# Altium PCB B1001_01.PcbDoc
Units mil, origin at the board's own origin, x right, y up, seen from the top; angles counter-clockwise.
Board outline 3159.61 x 1978.5 mil, 2 copper layers (Top Layer, Bottom Layer); 15 components, 23 nets, 107 pads, 22 vias.
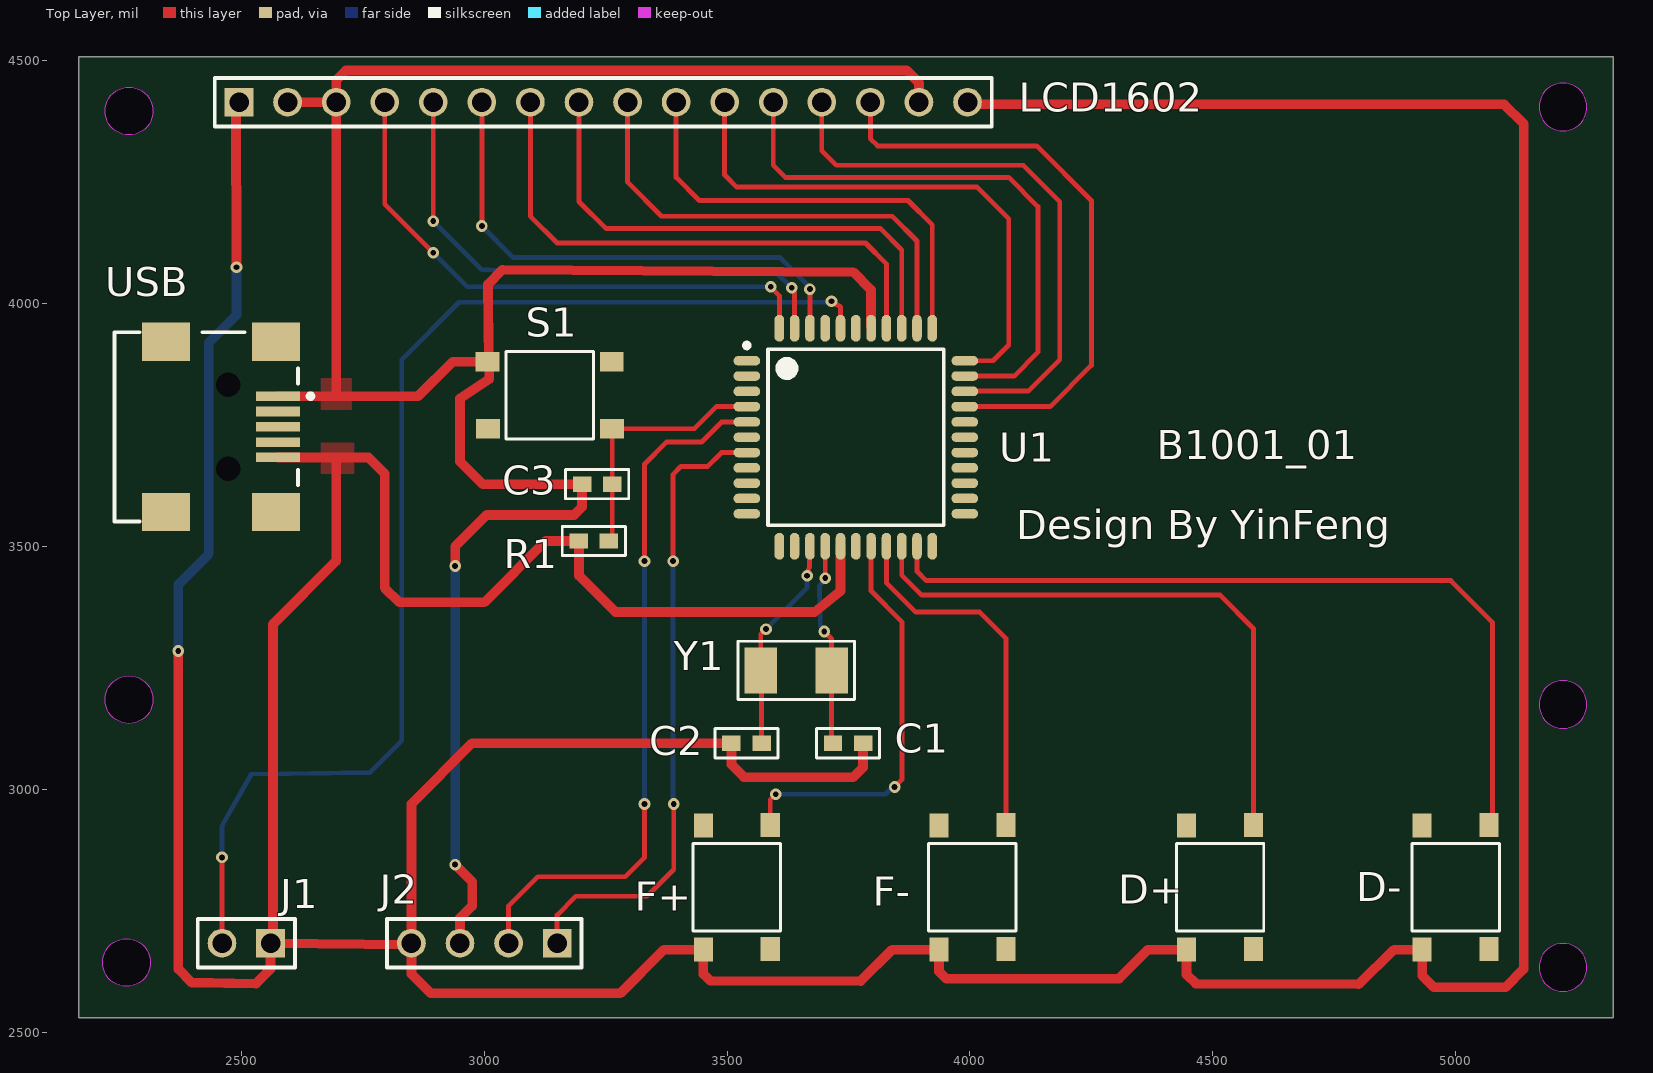
[diagram p0: Top Layer view]
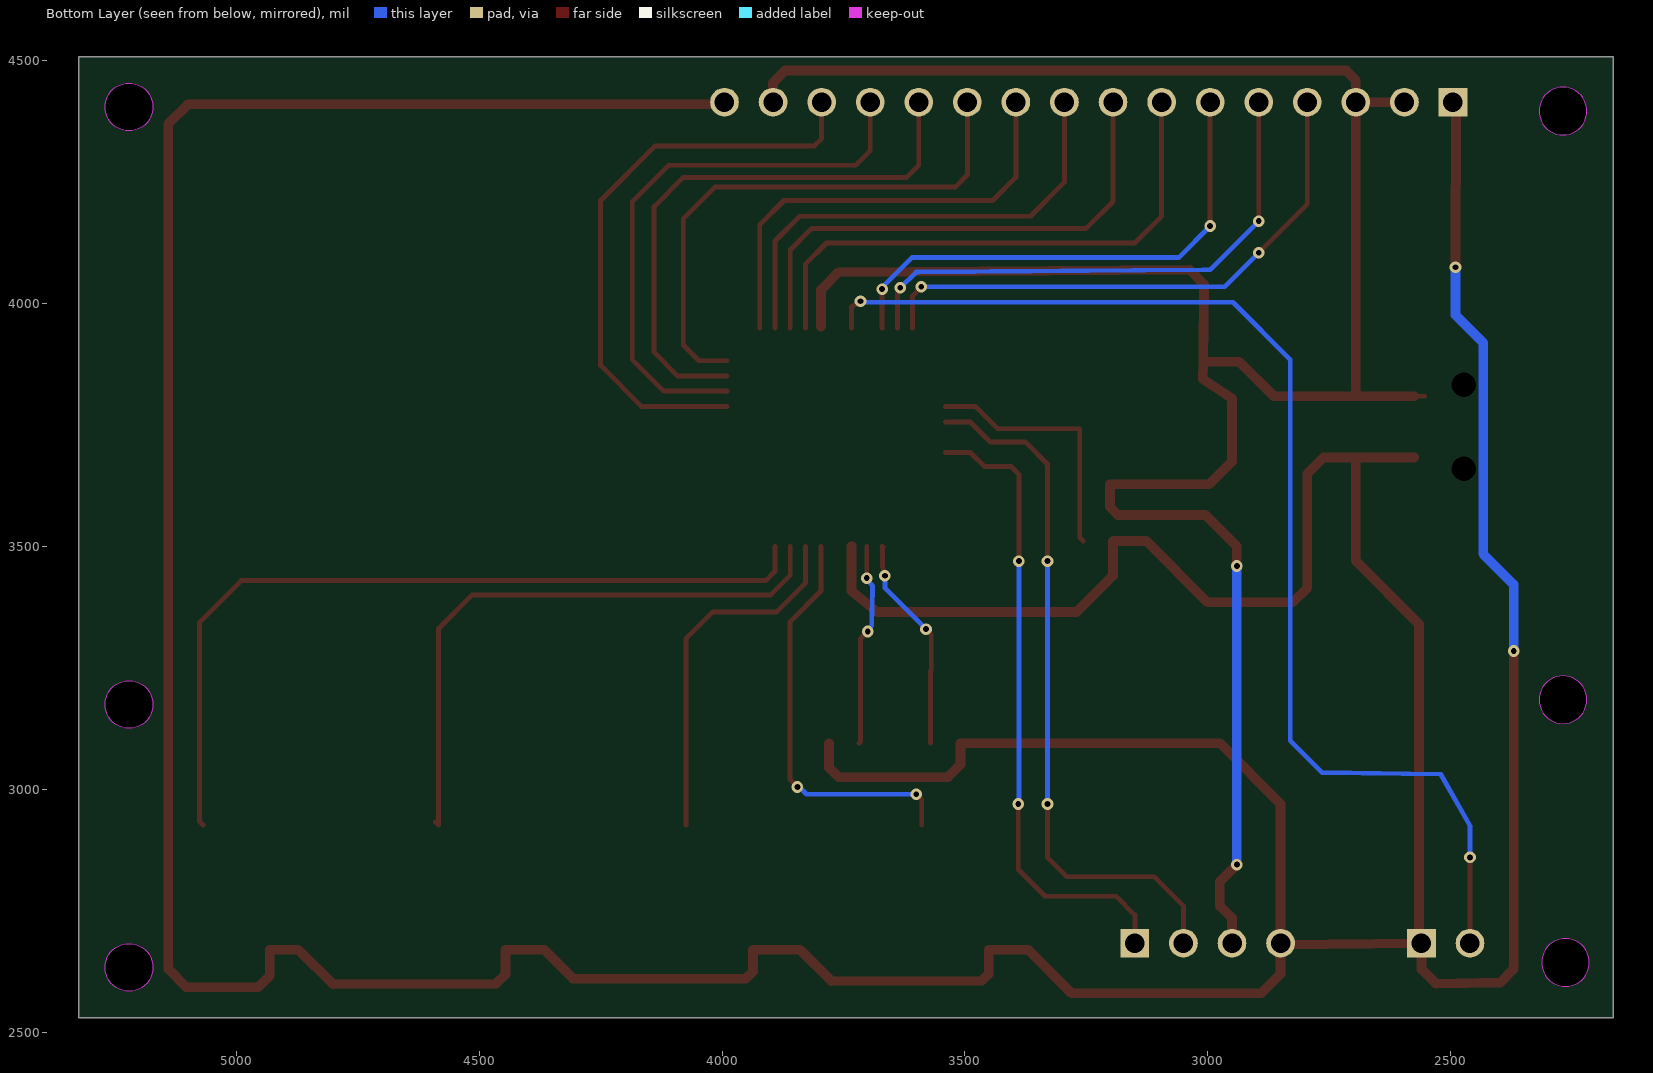
[diagram p1: Bottom Layer view, seen from below]

## Layer stack, top to bottom
Top Solder: solder mask 0.4, Solder Resist, Dk 3.5
Top Layer: signal copper 1.4
Dielectric 1: dielectric 12.6, FR-4, Dk 4.8
Bottom Layer: signal copper 1.4
Bottom Solder: solder mask 0.4, Solder Resist, Dk 3.5

## Board outline
2165,2530 5324.61,2530 5324.61,4508.5 2165,4508.5
cut-out: 5171.97,2633.43 ccw(c5221.18,2633.43) 5221.18,2584.21 ccw(c5221.18,2633.43) 5270.39,2633.43 ccw(c5221.18,2633.43) 5221.18,2682.64 ccw(c5221.18,2633.43)
cut-out: 5171.97,3174.76 ccw(c5221.18,3174.76) 5221.18,3125.55 ccw(c5221.18,3174.76) 5270.39,3174.76 ccw(c5221.18,3174.76) 5221.18,3223.98 ccw(c5221.18,3174.76)
cut-out: 2263.43,2594.21 cw(c2263.43,2643.43) 2214.21,2643.43 cw(c2263.43,2643.43) 2263.43,2692.64 cw(c2263.43,2643.43) 2312.64,2643.43 cw(c2263.43,2643.43)
cut-out: 2268.43,3135.39 cw(c2268.43,3184.61) 2219.21,3184.61 cw(c2268.43,3184.61) 2268.43,3233.82 cw(c2268.43,3184.61) 2317.64,3184.61 cw(c2268.43,3184.61)
cut-out: 5171.97,4405.08 ccw(c5221.18,4405.08) 5221.18,4355.87 ccw(c5221.18,4405.08) 5270.39,4405.08 ccw(c5221.18,4405.08) 5221.18,4454.29 ccw(c5221.18,4405.08)
cut-out: 2268.43,4347.36 cw(c2268.43,4396.57) 2219.21,4396.57 cw(c2268.43,4396.57) 2268.43,4445.79 cw(c2268.43,4396.57) 2317.64,4396.57 cw(c2268.43,4396.57)

## Design rules (kind name [scope] priority, off if disabled: settings)
Clearance [All] p1: gap=10 ignorepadtopadclearanceinfootprint=FALSE except(0: Arc-Hole Track-Hole SMDPad-Hole THPad-Hole Via-Hole Fill-Hole Poly-Hole Region-Hole Text-Hole)
PolygonConnect [All] p1: connectstyle=Relief reliefconductorwidth=10 reliefentries=4 polygonreliefangle="90 Angle" airgapwidth=10
RoutingVias [All] p1: holewidth=28 width=50 viastyle="Through Hole" minholewidth=28 minwidth=50 maxholewidth=28 maxwidth=50
SolderMaskExpansion [All] p1: expansion=4
Width [All] p1: maxlimit=10 minlimit=10 preferedwidth=10
30 further rules are at their usual default settings.

## Components (designator, comment, footprint, x,y, rotation, side; value= is the part's Value field where it differs from the comment)
C1 "Cap" 0603P 3749,3095 r180 top value=30pF
C2 "Cap" 0603P 3540,3095 r0 top value=30pF
C3 "Cap" 0603P 3232.4,3628.3 r180 top value=30pF
D+ "SW-PB" SMD4 4515,2798.43 r90 top
D- "SW-PB" SMD4 5000,2798.43 r90 top
F+ "SW-PB" SMD4 3520,2798.43 r90 top
F- "SW-PB" SMD4 4005,2798.43 r90 top
J1 "Header 2" HDR1X2 2560,2683.43 r180 top
J2 "CON4" HDR1X4 3150,2683.43 r180 top
LCD1602 "LCD1602" HDR1X16 2495,4415 r0 top
R1 "Res1" 0603P 3225.59,3511.49 r0 top value=10K
S1 "SW-PB" SMD4 3135,3811.49 r180 top
U1 "STC89C52" LQFP-44 3765,3725 r0 top
USB "USB" USB/SM0.8-6H5 2460,3746.5 r180 top
Y1 "11.0592M" SMD5032 3642.17,3245 r180 top

## Footprints (in the part's own frame and the unit in brackets; to place one, negate y for a bottom-side part, rotate by r counter-clockwise, add the part's x,y. Pads: shape width x height; smd on the part's side, far side on the other; paste and mask are expansions set on the pad)
0603P [mm]
  rect 0.965x0.8 smd: 1(-0.787,0) 2(0.788,0)
  silkscreen extent -1.65,-0.76 1.65,0.76
HDR1X2 [mm] "Connector; Header; 2 Position"
  rect 1.5x1.5 hole 1.02: 1(0,0)
  round 1.5 hole 1.02: 2(2.54,0)
  silkscreen extent -1.27,-1.27 3.81,1.27
HDR1X4 [mm] "Connector; Header; 4 Position"
  rect 1.5x1.5 hole 1.02: 1(0,0)
  round 1.5 hole 1.02: 2(2.54,0) 3(5.08,0) 4(7.62,0)
  silkscreen extent -1.27,-1.27 8.89,1.27
HDR1X16 [mm] "Connector; Header; 16 Position"
  rect 1.5x1.5 hole 1.02: 1(0,0)
  round 1.5 hole 1.02: 2(2.54,0) 3(5.08,0) 4(7.62,0) 5(10.16,0) 6(12.7,0) 7(15.24,0) 8(17.78,0) 9(20.32,0) 10(22.86,0) 11(25.4,0) 12(27.94,0) 13(30.48,0) 14(33.02,0) 15(35.56,0) 16(38.1,0)
  silkscreen extent -1.27,-1.27 39.37,1.27
LQFP-44 [mm] "LQFP-44"
  oval 1.4x0.5 smd: 1(-5.7,4) 2(-5.7,3.2) 3(-5.7,2.4) 4(-5.7,1.6) 5(-5.7,0.8) 6(-5.7,0) 7(-5.7,-0.8) 8(-5.7,-1.6) 9(-5.7,-2.4) 10(-5.7,-3.2) 11(-5.7,-4) 23(5.7,-4) 24(5.7,-3.2) 25(5.7,-2.4) 26(5.7,-1.6) 27(5.7,-0.8) 28(5.7,0) 29(5.7,0.8) 30(5.7,1.6) 31(5.7,2.4) 32(5.7,3.2) 33(5.7,4)
  oval 0.5x1.4 smd: 12(-4,-5.7) 13(-3.2,-5.7) 14(-2.4,-5.7) 15(-1.6,-5.7) 16(-0.8,-5.7) 17(0,-5.7) 18(0.8,-5.7) 19(1.6,-5.7) 20(2.4,-5.7) 21(3.2,-5.7) 22(4,-5.7) 34(4,5.7) 35(3.2,5.7) 36(2.4,5.7) 37(1.6,5.7) 38(0.8,5.7) 39(0,5.7) 40(-0.8,5.7) 41(-1.6,5.7) 42(-2.4,5.7) 43(-3.2,5.7) 44(-4,5.7)
  silkscreen extent -5.82,-4.6 4.6,4.92, body extent -6,-6 6,6, height 1.6
SMD4 [mm]
  rect 1.25x1 smd: 1(-3.261,1.75) 2(3.261,-1.75) 3(-3.238,-1.75) 4(3.238,1.75)
  silkscreen extent -2.29,-2.29 2.29,2.29
SMD5032 [mm]
  rect 1.7x2.4 smd: 1(-1.85,0) 2(1.85,0)
  silkscreen extent -3.05,-1.52 3.05,1.52
USB/SM0.8-6H5 [mm]
  rect 2.3x0.5 smd: 1(-2.927,-1.6) 2(-2.927,-0.8) 3(-2.927,0) 4(-2.927,0.8) 5(-2.927,1.6)
  rect 2.5x2 smd: 6(-2.827,4.45) 7(2.927,4.45) 8(-2.827,-4.45) 9(2.927,-4.45)
  round 0.6 hole 1.27 unplated: MH1(-0.327,2.2) MH2(-0.327,-2.2)
  silkscreen extent -4.75,-4.95 5.62,4.95

## Part data
C1 C2 C3: "Capacitor", LatestRevisionDate=17-Jul-2002, LatestRevisionNote="Re-released for DXP Platform.", PackageDescription="Radial Cap, Thru-Hole; 2 Leads; 0.3 in Pin Spacing", PackageReference=RAD-0.3, Published=8-Jun-2000, Publisher="Altium Limited"
D+ D- F+ F- S1: "Switch", LatestRevisionDate=17-Jul-2002, LatestRevisionNote="Re-released for DXP Platform.", PackageDescription="Switch; 2 Leads", PackageReference=SPST-2, Published=24-Mar-1999, Publisher="Altium Limited"
J1: "Header, 2-Pin", LatestRevisionDate=17-Jul-2002, LatestRevisionNote="Re-released for DXP Platform.", Publisher="Altium Limited"
R1: "Resistor", LatestRevisionDate=17-Jul-2002, LatestRevisionNote="Re-released for DXP Platform.", PackageDescription="Axial Device, Thru-Hole; 2 Leads; 0.3 in Pin Spacing", PackageReference=AXIAL-0.3, Published=8-Jun-2000, Publisher="Altium Limited"
Y1: library part XTAL, "Crystal Oscillator", LatestRevisionDate=17-Jul-2002, LatestRevisionNote="Re-released for DXP Platform.", PackageDescription="Crystal, Thru-Hole; 2 Leads; Body 3.1 x 8.2 mm (Dia.xH)", PackageReference=R38, Published=8-Jun-2000, Publisher="Altium Limited"

## Via types
v1: diameter 24, hole 12, Top Layer to Bottom Layer, tented both sides, 22 vias

## Nets (pads, with @x,y where several pads share a name; then routed paths per layer and width w, separated by ;. In a path a pad name is that pad's centre, name@x,y a point inside that pad or via, vN(x,y) a via of type N, cw(c..) or ccw(c..) an arc to the next point about the centre after c; other vN are vias at no path point)
+5: C3.2 J2.3 LCD1602.2 LCD1602.3 LCD1602.15 S1.2 U1.38 USB.1 | length 5249
  Top Layer w10: USB.1@2553.23,3809.49 USB.1@2575.23,3809.9 ; 2695,3814.49 2700,3809.49 ; 2861.08,3809.49 2862.56,3808 2864.05,3809.49 ; v1(2940,2845) v1@2943.79,2845 ; 3760,4065 3761.5,4065 ; U1.38 3794.64,3951.26 U1.38@3796.5,3953.12 ; LCD1602.15@3890.47,4419.53 LCD1602.15
  Top Layer w20: USB.1 2700,3809.49 2861.08,3809.49 ; LCD1602.2 LCD1602.3 ; 2695,3814.49 LCD1602.3 ; 2864.05,3809.49 2934.95,3880.39 S1.2 ; v1(2940,2845) 2975,2810 2975,2760 2950,2735 J2.3 ; v1(2940,3460) 2940,3500 3005,3565 3185,3565 3201.4,3581.4 C3.2 2996.7,3628.3 2950,3675 2950,3805 3010,3845 3009.44,3880.44 3007.5,4040 3037.5,4070 3760,4065 3796.5,4028.5 U1.38@3796.5,3953.12 ; 3890.47,4459.53 3870,4480 2715,4480 2695,4460 LCD1602.3 ; LCD1602.15 3895,4455
  Bottom Layer w20: v1(2940,2845) v1(2940,3460)
D0: LCD1602.7 U1.37 | length 1141.2
  Top Layer w10: LCD1602.7 3095,4180 3150,4125 3785,4125 3827.99,4082.01 U1.37
D1: LCD1602.8 U1.36 | length 1071.8
  Top Layer w10: LCD1602.8 3195,4210 3250,4155 3815,4155 3859.49,4110.51 U1.36
D2: LCD1602.9 U1.35 | length 990.7
  Top Layer w10: LCD1602.9 3295,4250 3365,4180 3840,4180 3890.98,4129.02 U1.35
D3: LCD1602.10 U1.34 | length 936
  Top Layer w10: LCD1602.10 3395,4260 3442.5,4212.5 3872.5,4212.5 3922.48,4162.52 U1.34
D4: LCD1602.11 U1.33 | length 1136.3
  Top Layer w10: LCD1602.11 3495,4265 3520,4240 4015,4240 4080,4175 4080,3915 4047.48,3882.48 U1.33
D5: LCD1602.12 U1.32 | length 1181.1
  Top Layer w10: LCD1602.12 3595,4285 3620,4260 4080,4260 4140,4200 4140,3900 4090.98,3850.98 U1.32
D6: LCD1602.13 U1.31 | length 1181.2
  Top Layer w10: LCD1602.13 3695,4315 3725,4285 4110,4285 4185,4210 4185,3885 4120,3820 3989.92,3820 U1.31
D7: LCD1602.14 U1.30 | length 1218.1
  Top Layer w10: LCD1602.14 3795,4340 3810,4325 4137.5,4325 4250,4212.5 4250,3872.99 4165,3787.99 U1.30
EN: LCD1602.6 U1.42 | length 1067.9
  Top Layer w10: v1(2995,4160) LCD1602.6 ; U1.42@3670,3949.92 U1.42 v1(3670.51,4030)
  Bottom Layer w10: v1(2995,4160) 3060,4095 3609.3,4095 3670.51,4033.79 v1(3670.51,4030)
GND: C1.1 C2.1 D+.1 D-.1 F+.1 F-.1 J1.1 J2.4 LCD1602.1 LCD1602.16 R1.1 U1.16 USB.5 | length 12167.3
  Top Layer w10: LCD1602.1@2488.78,4434.41 LCD1602.1@2488.86,4410.63 ; J1.1 J1.1@2565,2688.43 ; 2761.49,3683.51 2765,3680 ; J2.4@2850,2680 J2.4 ; R1.1 R1.1@3195,3511.08 ; 4446.1,2618.9 4446.1,2623.9
  Top Layer w20: v1(2370,3285) 2370,2630 2397.49,2602.51 2530,2600 2560,2630 J1.1 J2.4@2849.96,2680.06 ; LCD1602.1@2488.86,4410.63 v1@2490,4076.22 ; J1.1@2565,2688.43 2565,3340 2695,3470 2695,3680 ; USB.5 2761.49,3683.51 ; 2765,3680 2795,3650 2795,3415 2825,3385 3000,3385 3126.49,3511.49 R1.1 ; J2.4@2850,2680 2850,2620 2890,2580 3280,2580 3370.02,2670.02 F+.1 3451.1,2620 3465,2606.1 3775,2605 3840.02,2670.02 F-.1 3936.1,2625 3950.99,2610.11 4306.89,2610.11 4366.8,2670.02 D+.1 4446.1,2623.9 ; J2.4 2850,2970 2975,3095 C2.1 3509,3051 3535,3025 3760,3025 3780,3045 C1.1 ; R1.1@3195,3511.08 3195,3440 3270,3365 3680,3365 3733.5,3408.5 U1.16 ; LCD1602.16@3988.78,4410.63 5100,4410.63 5140,4370.63 5140,2630 5102.51,2592.51 4955,2592.51 4931.1,2616.4 D-.1 4873.37,2670.02 4800,2598.63 4465,2600 4446.1,2618.9
  Bottom Layer w20: v1(2370,3285) 2370,3422.13 2432.87,3485 2432.87,3919.82 2490,3976.95 v1(2490,4075)
KEY1: F+.2 U1.18 | length 847.1
  Top Layer w10: F+.2 3588.9,2978.9 v1(3600,2990) ; U1.18 3796.5,3408.5 3860,3345 3860,3020 v1(3845,3005)
  Bottom Layer w10: v1(3600,2990) 3826.21,2990 3841.21,3005 v1(3845,3005)
KEY2: F-.2 U1.19 | length 752.5
  Top Layer w10: U1.19 3827.99,3425.79 3888.78,3365 4020,3365 4073.9,3311.1 F-.2
KEY3: D+.2 U1.20 | length 1242.3
  Top Layer w10: U1.20 3859.49,3441.26 3900.75,3400 4515,3400 4583.9,3331.1 D+.2 D+.2@4590,2932.93
KEY4: D-.2 U1.21 | length 1700.2
  Top Layer w10: U1.21 3890.98,3448.76 3910,3429.75 4990.25,3429.75 5075.86,3344.14 5075.86,2933.79 D-.2
PWM: J1.2 U1.40 | length 2491.1
  Top Layer w10: J1.2 v1(2460,2860) ; v1@3713.5,4005 3733.5,3993.5 U1.40 ; v1(3715,4005) v1@3718.79,4005
  Bottom Layer w10: v1(2460,2860) 2460,2925 2520,3031.15 2765,3035 2830,3100 2830,3885 2948,4003 3713,4003 v1(3715,4005)
RS: LCD1602.4 U1.44 | length 1167.8
  Top Layer w10: LCD1602.4 2795,4205 v1(2895,4105) ; v1(3590,4035) 3607.52,4015.98 U1.44
  Bottom Layer w10: v1(2895,4105) 2965,4035 v1(3590,4035)
RST: C3.1 R1.2 S1.1 U1.4 | length 529.9
  Top Layer w10: R1.2 3263.41,3518.3 C3.1 S1.1 3432.6,3742.6 3477.99,3787.99 U1.4
RW: LCD1602.5 U1.43 | length 1123.6
  Top Layer w10: v1(2895,4170) LCD1602.5 ; v1(3633,4032.66) 3633,4028.87 3639.02,4022.86 U1.43
  Bottom Layer w10: v1(2895,4170) 2995,4070 3010,4070 3595,4065.12 3600.54,4065.12 v1(3633,4032.66)
RXD: J2.2 U1.5 | length 1454.4
  Top Layer w10: J2.2 3050,2760 3110,2820 3290,2820 3330,2860 v1(3330,2970) ; v1(3330,3470) 3330,3670 3375,3715 3447.28,3715 3488.78,3756.5 U1.5
  Bottom Layer w10: v1(3330,2970) v1(3330,3470)
TXD: J2.1 U1.7 | length 1321.3
  Top Layer w10: J2.1 3150,2741.22 3188.78,2780 3335,2780 3390,2835 v1(3390,2970) ; v1(3388.78,3470) 3388.78,3648.78 3405,3665 3460,3665 3488.5,3693.5 U1.7
  Bottom Layer w10: v1(3388.78,3470) 3388.78,2971.22 v1(3390,2970)
XTAL1: C1.2 U1.15 Y1.1 | length 421.5
  Top Layer w10: v1(3700,3325) 3715,3310 Y1.1 3715,3097.99 C1.2 ; v1(3702.01,3435) U1.15
  Bottom Layer w10: v1(3700,3325) 3700,3328.79 3691.76,3337.03 3690,3415 3690,3419.2 3702.01,3431.21 v1(3702.01,3435)
XTAL2: C2.2 U1.14 Y1.2 | length 452.4
  Top Layer w10: C2.2 3571,3243.33 Y1.2 3569.33,3319.33 v1(3580,3330) ; v1@3661.1,3436.34 3662.76,3440.75 3670,3460 3670,3497.4 3668.66,3498.74 U1.14
  Bottom Layer w10: v1(3580,3330) 3664.76,3414.76 v1(3664.76,3440)
pads on no net: D+.3 D+.4 D-.3 D-.4 F+.3 F+.4 F-.3 F-.4 S1.3 S1.4 U1.1 U1.2 U1.3 U1.6 U1.8 U1.9 U1.10 U1.11 U1.12 U1.13 U1.17 U1.22 U1.23 U1.24 U1.25 U1.26 U1.27 U1.28 U1.29 U1.39 U1.41 USB.2 USB.3 USB.4 USB.6 USB.7 USB.8 USB.9 USB.MH1 USB.MH2

## Polygon pours and split planes (outlines as drawn)
no net on Top Layer "Top Layer-No Net 1" (hatched Horizontal grid 4 track 5, remove dead copper, pour order 20): 2760,3695
GND on Top Layer "Top Layer-GND" (hatched Horizontal grid 4 track 5, remove dead copper, pour order 18): 2665,3715 2730,3715 2730,3650 2665,3650
no net on Top Layer "Top Layer-No Net 2" (hatched Horizontal grid 4 track 5, remove dead copper, pour order 16): 2670,3725
+5 on Top Layer "Top Layer-+5" (hatched Horizontal grid 4 track 5, remove dead copper, pour order 14): 2665,3845 2725,3845 2725,3782.99 2665,3782.99
no net on Top Layer "Top Layer-No Net 3" (hatched Horizontal grid 4 track 5, remove dead copper, pour order 12): 2665,3970
no net on Top Layer "Top Layer-No Net" (hatched Horizontal grid 4 track 5, remove dead copper, pour order 6): 2555,4343.79
no net on Bottom Layer "Bottom Layer-No Net" (hatched Horizontal grid 4 track 5, remove dead copper, pour order 10): 2165,4500

## Silkscreen, mask and mechanical layers (free items; w line width, h text height)
Top Overlay:
  text "B1001_01" at 4385,3680 h60
  text "Design By YinFeng" at 4095,3515 h60
Mechanical 1:
  circle w10: c5221.18,2633.43 r49.21
  circle w10: c5221.18,3174.76 r49.21
  circle w10: c2268.43,3184.61 r49.21
  circle w10: c2263.43,2643.43 r49.21
  circle w10: c5221.18,4405.08 r49.21
  circle w10: c2268.43,4396.57 r49.21
  lines w10: 2170,2535 5319.61,2535 5319.61,4503.5 2170,4503.5 2170,2535